# EAGLE board Qwiic EEPROM-Panel (EAGLE 9.0.1), part 1 of 2
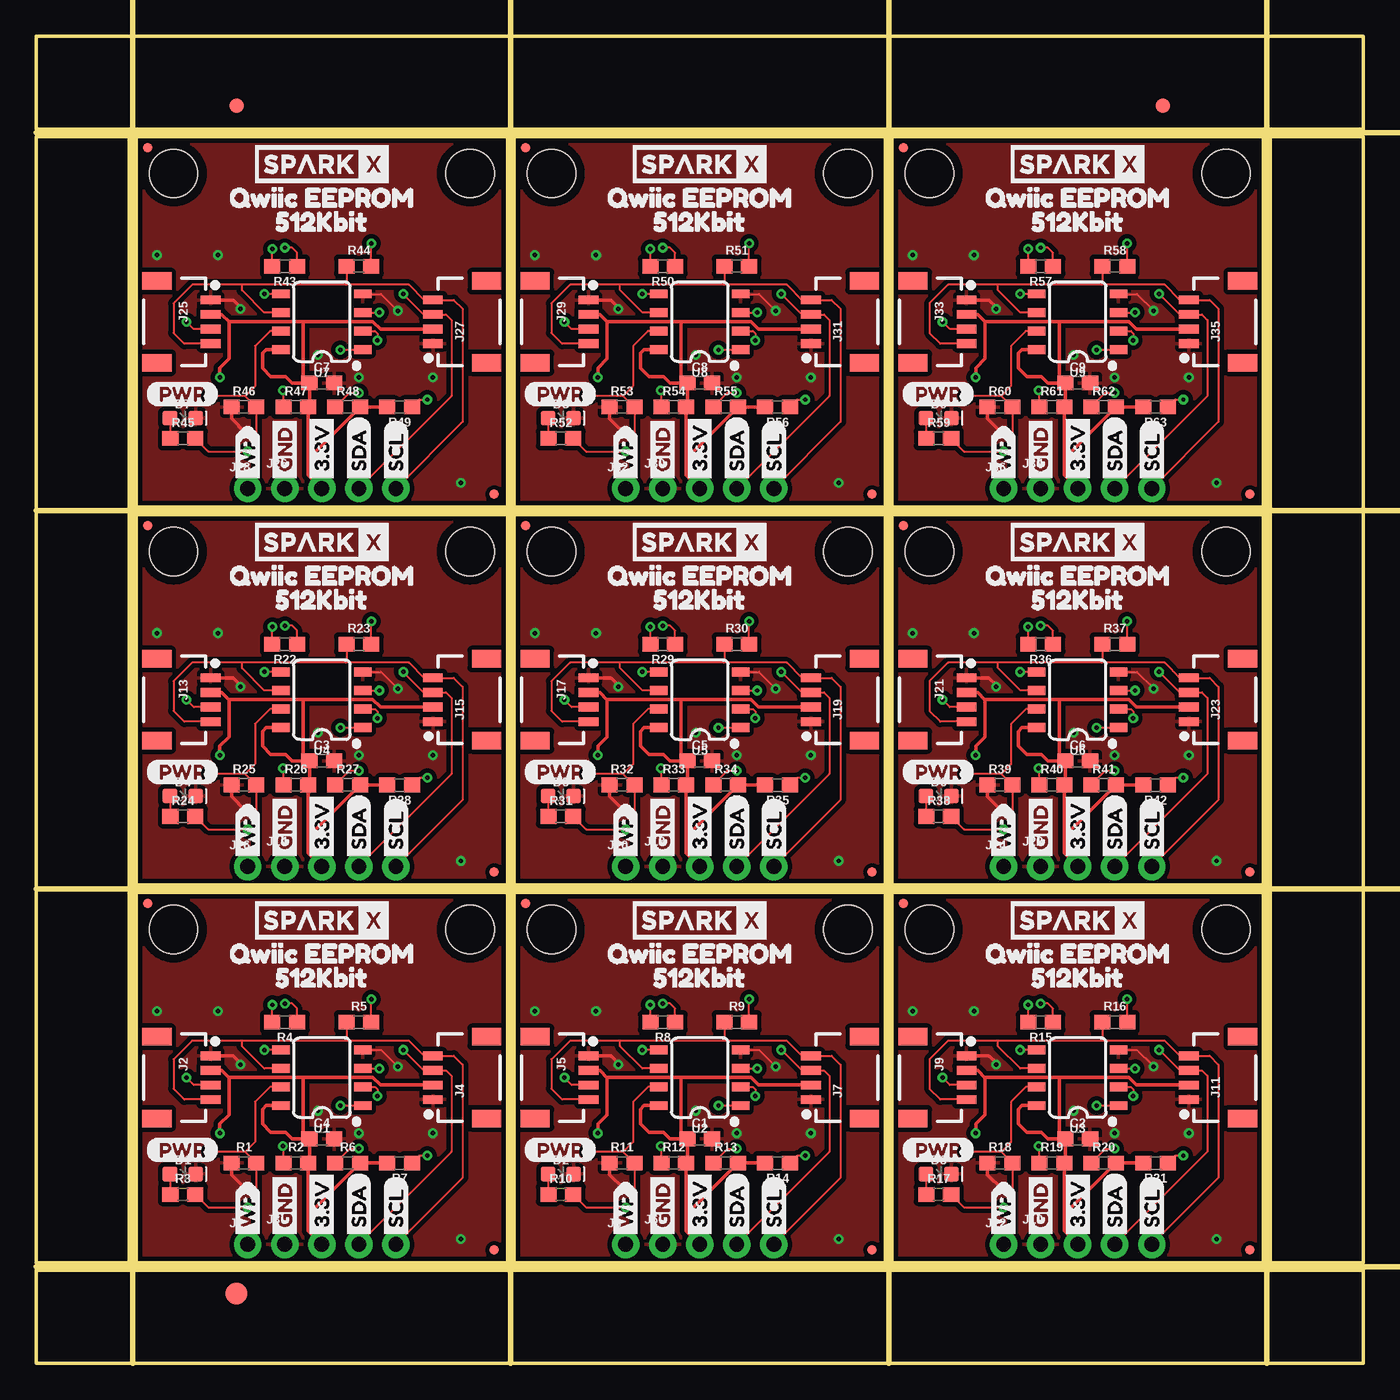
[diagram p0: board, top side]
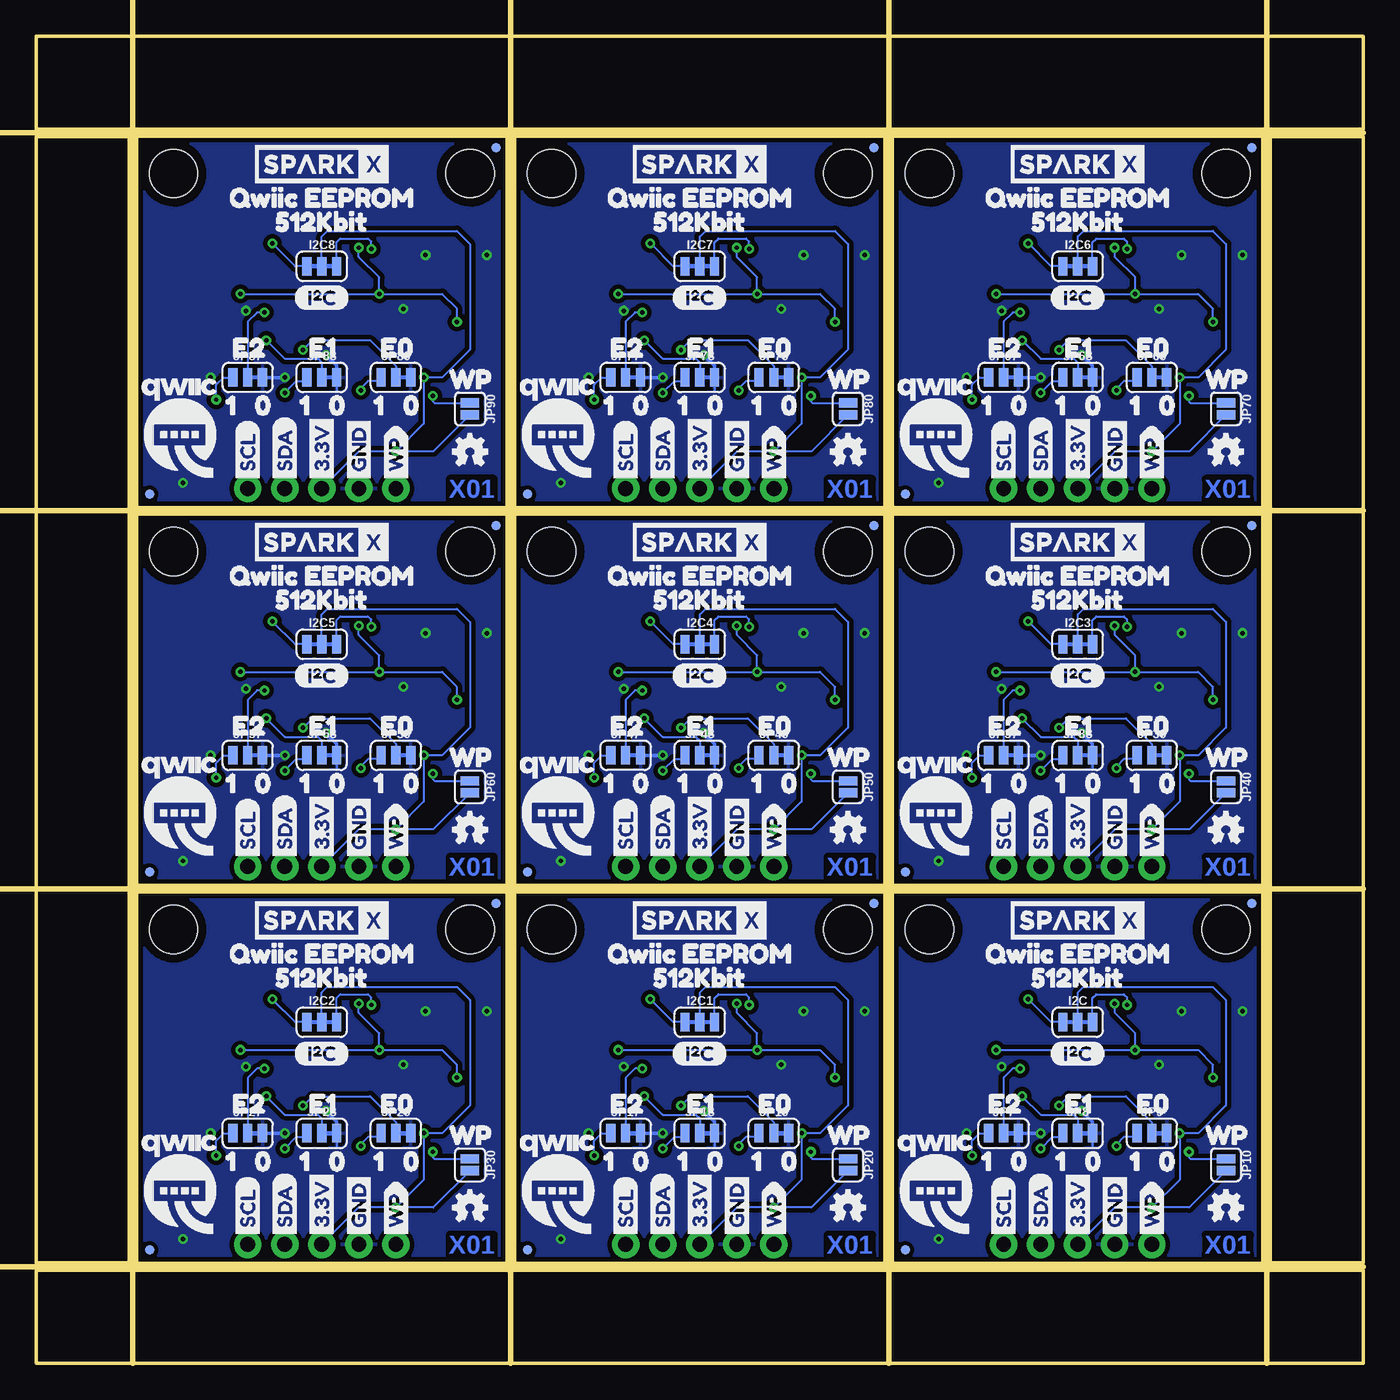
[diagram p1: board, bottom side, seen from below]

Size 90.93 x 90.93 mm. Coordinates in mm from the lower left corner, seen from the top.
Outline: 6.86,6.86 6.86,32.26 32.26,32.26 32.26,6.86 6.86,6.86
Outline: 32.77,6.86 32.77,32.26 58.17,32.26 58.17,6.86 32.77,6.86
Outline: 58.67,6.86 58.67,32.26 84.07,32.26 84.07,6.86 58.67,6.86
Outline: 6.86,32.77 6.86,58.17 32.26,58.17 32.26,32.77 6.86,32.77
Outline: 32.77,32.77 32.77,58.17 58.17,58.17 58.17,32.77 32.77,32.77
Outline: 58.67,32.77 58.67,58.17 84.07,58.17 84.07,32.77 58.67,32.77
Outline: 6.86,58.67 6.86,84.07 32.26,84.07 32.26,58.67 6.86,58.67
Outline: 32.77,58.67 32.77,84.07 58.17,84.07 58.17,58.67 32.77,58.67
Outline: 58.67,58.67 58.67,84.07 84.07,84.07 84.07,58.67 58.67,58.67
Outline: 0,6.35 90.93,6.35 90.93,0 0,0 0,6.35
Outline: 84.58,84.07 90.93,84.07 90.93,6.86 84.58,6.86 84.58,84.07
Outline: 0,90.93 90.93,90.93 90.93,84.58 0,84.58 0,90.93
Outline: 0,84.07 6.35,84.07 6.35,6.86 0,6.86 0,84.07
Copper layers (1*16): Top 0.035mm / dielectric 1.5mm / Bottom 0.035mm
Design rules "SparkFun-2-layer-PCBWay-LIMIT": minimum track width 6mil, minimum drill 0.3mm, track to track 6mil, track to pad 6mil, pad to pad 6mil, via to via 6mil, smd to smd 6mil, copper to edge 6mil, drill to drill 6mil, minimum pad ring 7mil, minimum via ring 7mil, stop-mask expansion 4mil, vias tented up to drill 25mil, thermal gap 10mil
tRestrict: area 21.2,20.8 to 21.6,21.8; area 47.1,20.8 to 47.5,21.8; area 73,20.8 to 73.4,21.8; area 21.2,46.7 to 21.6,47.8; area 47.1,46.7 to 47.5,47.8; area 73,46.7 to 73.4,47.8; area 21.2,72.6 to 21.6,73.7; area 47.1,72.6 to 47.5,73.7; area 73,72.6 to 73.4,73.7
Milling: 8 lines

## Footprints (pad centres in the part's own frame; a part is rotated, then mirrored left to right if it is on the bottom)
0603 = smd 1.1 x 1: 1 -0.85,0; 2 0.85,0
LED-0603 = smd 1 x 1: A -0.877,0; C 0.877,0
FIDUCIAL-1X2 = smd 1 x 1: 1 0,0
FIDUCIAL-1.5X3 = smd 1.5 x 1.5: 1 0,0
SMT-JUMPER_3_2-NC_TRACE_SILK = smd 0.635 x 1.27: 1 -1.016,0; 2 0,0; 3 1.016,0
1X01_NO_SILK = drill 1.016 pad 1.88: 1 0,0
1X04_1MM_RA = smd 0.6 x 1.35: 1 -1.5,0; 2 -0.5,0; 3 0.5,0; 4 1.5,0 | smd 1.2 x 2: NC1 2.8,-3.675; NC2 -2.8,-3.675
1X04_NO_SILK = drill 1.016 pad 1.88: 1 0,0; 2 2.54,0; 3 5.08,0; 4 7.62,0
MICRO-FIDUCIAL = smd 0.635 x 0.635: 1 0,0
STAND-OFF = hole 3.302: 0,0
SMT-JUMPER_3_1-NC_TRACE_SILK = smd 0.635 x 1.27: 1 -1.016,0; 2 0,0; 3 1.016,0
SMT-JUMPER_2_NO_SILK = smd 0.635 x 1.27: 1 -0.406,0; 2 0.406,0
SO08 = smd 0.6 x 1.2: 1 -1.905,-2.8; 2 -0.635,-2.8; 3 0.635,-2.8; 4 1.905,-2.8; 5 1.905,2.8; 6 0.635,2.8; 7 -0.635,2.8; 8 -1.905,2.8

## Placement (x,y rotation side)
C1  0.1uF  [0603]  45.47,15.37 0 top
C2  0.1uF  [0603]  71.37,15.37 0 top
C3  0.1uF  [0603]  19.56,41.27 0 top
C4  0.1uF  [0603]  19.56,15.37 0 top
C5  0.1uF  [0603]  45.47,41.27 0 top
C6  0.1uF  [0603]  71.37,41.27 0 top
C7  0.1uF  [0603]  19.56,67.18 0 top
C8  0.1uF  [0603]  45.47,67.18 0 top
C9  0.1uF  [0603]  71.37,67.18 0 top
D1  RED  [LED-0603]  10.03,12.95 0 top
D2  RED  [LED-0603]  35.94,12.95 0 top
D3  RED  [LED-0603]  61.85,12.95 0 top
D4  RED  [LED-0603]  10.03,38.86 0 top
D5  RED  [LED-0603]  35.94,38.86 0 top
D6  RED  [LED-0603]  61.85,38.86 0 top
D7  RED  [LED-0603]  10.03,64.77 0 top
D8  RED  [LED-0603]  35.94,64.77 0 top
D9  RED  [LED-0603]  61.85,64.77 0 top
E$1  [FIDUCIAL-1X2]  13.72,86.17 0 top
E$2  [FIDUCIAL-1X2]  77.22,86.17 0 top
E$3  [FIDUCIAL-1.5X3]  13.72,4.76 0 top
I2C  [SMT-JUMPER_3_2-NC_TRACE_SILK]  19.56,23.37 0 bottom
I2C1  [SMT-JUMPER_3_2-NC_TRACE_SILK]  45.47,23.37 0 bottom
I2C2  [SMT-JUMPER_3_2-NC_TRACE_SILK]  71.37,23.37 0 bottom
I2C3  [SMT-JUMPER_3_2-NC_TRACE_SILK]  19.56,49.28 0 bottom
I2C4  [SMT-JUMPER_3_2-NC_TRACE_SILK]  45.47,49.28 0 bottom
I2C5  [SMT-JUMPER_3_2-NC_TRACE_SILK]  71.37,49.28 0 bottom
I2C6  [SMT-JUMPER_3_2-NC_TRACE_SILK]  19.56,75.18 0 bottom
I2C7  [SMT-JUMPER_3_2-NC_TRACE_SILK]  45.47,75.18 0 bottom
I2C8  [SMT-JUMPER_3_2-NC_TRACE_SILK]  71.37,75.18 0 bottom
J1  [1X01_NO_SILK]  14.48,8.13 0 top
J2  SMD  [1X04_1MM_RA]  11.94,19.56 270 top
J3  PTH  [1X04_NO_SILK]  17.02,8.13 0 top
J4  SMD  [1X04_1MM_RA]  27.18,19.56 90 top
J5  SMD  [1X04_1MM_RA]  37.85,19.56 270 top
J6  PTH  [1X04_NO_SILK]  42.93,8.13 0 top
J7  SMD  [1X04_1MM_RA]  53.09,19.56 90 top
J8  [1X01_NO_SILK]  40.39,8.13 0 top
J9  SMD  [1X04_1MM_RA]  63.75,19.56 270 top
J10  PTH  [1X04_NO_SILK]  68.83,8.13 0 top
J11  SMD  [1X04_1MM_RA]  78.99,19.56 90 top
J12  [1X01_NO_SILK]  66.29,8.13 0 top
J13  SMD  [1X04_1MM_RA]  11.94,45.47 270 top
J14  PTH  [1X04_NO_SILK]  17.02,34.04 0 top
J15  SMD  [1X04_1MM_RA]  27.18,45.47 90 top
J16  [1X01_NO_SILK]  14.48,34.04 0 top
J17  SMD  [1X04_1MM_RA]  37.85,45.47 270 top
J18  PTH  [1X04_NO_SILK]  42.93,34.04 0 top
J19  SMD  [1X04_1MM_RA]  53.09,45.47 90 top
J20  [1X01_NO_SILK]  40.39,34.04 0 top
J21  SMD  [1X04_1MM_RA]  63.75,45.47 270 top
J22  PTH  [1X04_NO_SILK]  68.83,34.04 0 top
J23  SMD  [1X04_1MM_RA]  78.99,45.47 90 top
J24  [1X01_NO_SILK]  66.29,34.04 0 top
J25  SMD  [1X04_1MM_RA]  11.94,71.37 270 top
J26  PTH  [1X04_NO_SILK]  17.02,59.94 0 top
J27  SMD  [1X04_1MM_RA]  27.18,71.37 90 top
J28  [1X01_NO_SILK]  14.48,59.94 0 top
J29  SMD  [1X04_1MM_RA]  37.85,71.37 270 top
J30  PTH  [1X04_NO_SILK]  42.93,59.94 0 top
J31  SMD  [1X04_1MM_RA]  53.09,71.37 90 top
J32  [1X01_NO_SILK]  40.39,59.94 0 top
J33  SMD  [1X04_1MM_RA]  63.75,71.37 270 top
J34  PTH  [1X04_NO_SILK]  68.83,59.94 0 top
J35  SMD  [1X04_1MM_RA]  78.99,71.37 90 top
J36  [1X01_NO_SILK]  66.29,59.94 0 top
JP1  FIDUCIALUFIDUCIAL  [MICRO-FIDUCIAL]  7.62,31.5 0 bottom
JP2  FIDUCIALUFIDUCIAL  [MICRO-FIDUCIAL]  31.37,7.75 0 top
JP3  STAND-OFF  [STAND-OFF]  9.4,29.72 0 top
JP4  STAND-OFF  [STAND-OFF]  29.72,29.72 0 top
JP5  FIDUCIALUFIDUCIAL  [MICRO-FIDUCIAL]  31.37,7.75 0 bottom
JP6  FIDUCIALUFIDUCIAL  [MICRO-FIDUCIAL]  7.62,31.5 0 top
JP7  [SMT-JUMPER_3_1-NC_TRACE_SILK]  24.64,15.75 0 bottom
JP8  [SMT-JUMPER_3_1-NC_TRACE_SILK]  19.56,15.75 0 bottom
JP9  [SMT-JUMPER_3_1-NC_TRACE_SILK]  14.48,15.75 0 bottom
JP10  [SMT-JUMPER_2_NO_SILK]  9.4,13.59 270 bottom
JP11  STAND-OFF  [STAND-OFF]  35.31,29.72 0 top
JP12  STAND-OFF  [STAND-OFF]  55.63,29.72 0 top
JP13  FIDUCIALUFIDUCIAL  [MICRO-FIDUCIAL]  57.28,7.75 0 top
JP14  FIDUCIALUFIDUCIAL  [MICRO-FIDUCIAL]  33.53,31.5 0 top
JP15  FIDUCIALUFIDUCIAL  [MICRO-FIDUCIAL]  33.53,31.5 0 bottom
JP16  FIDUCIALUFIDUCIAL  [MICRO-FIDUCIAL]  57.28,7.75 0 bottom
JP17  [SMT-JUMPER_3_1-NC_TRACE_SILK]  50.55,15.75 0 bottom
JP18  [SMT-JUMPER_3_1-NC_TRACE_SILK]  45.47,15.75 0 bottom
JP19  [SMT-JUMPER_3_1-NC_TRACE_SILK]  40.39,15.75 0 bottom
JP20  [SMT-JUMPER_2_NO_SILK]  35.31,13.59 270 bottom
JP21  STAND-OFF  [STAND-OFF]  61.21,29.72 0 top
JP22  STAND-OFF  [STAND-OFF]  81.53,29.72 0 top
JP23  FIDUCIALUFIDUCIAL  [MICRO-FIDUCIAL]  83.19,7.75 0 top
JP24  FIDUCIALUFIDUCIAL  [MICRO-FIDUCIAL]  59.44,31.5 0 top
JP25  FIDUCIALUFIDUCIAL  [MICRO-FIDUCIAL]  59.44,31.5 0 bottom
JP26  FIDUCIALUFIDUCIAL  [MICRO-FIDUCIAL]  83.19,7.75 0 bottom
JP27  [SMT-JUMPER_3_1-NC_TRACE_SILK]  76.45,15.75 0 bottom
JP28  [SMT-JUMPER_3_1-NC_TRACE_SILK]  71.37,15.75 0 bottom
JP29  [SMT-JUMPER_3_1-NC_TRACE_SILK]  66.29,15.75 0 bottom
JP30  [SMT-JUMPER_2_NO_SILK]  61.21,13.59 270 bottom
JP31  STAND-OFF  [STAND-OFF]  9.4,55.63 0 top
JP32  STAND-OFF  [STAND-OFF]  29.72,55.63 0 top
JP33  FIDUCIALUFIDUCIAL  [MICRO-FIDUCIAL]  31.37,33.66 0 top
JP34  FIDUCIALUFIDUCIAL  [MICRO-FIDUCIAL]  7.62,57.4 0 top
JP35  FIDUCIALUFIDUCIAL  [MICRO-FIDUCIAL]  7.62,57.4 0 bottom
JP36  FIDUCIALUFIDUCIAL  [MICRO-FIDUCIAL]  31.37,33.66 0 bottom
JP37  [SMT-JUMPER_3_1-NC_TRACE_SILK]  24.64,41.66 0 bottom
JP38  [SMT-JUMPER_3_1-NC_TRACE_SILK]  19.56,41.66 0 bottom
JP39  [SMT-JUMPER_3_1-NC_TRACE_SILK]  14.48,41.66 0 bottom
JP40  [SMT-JUMPER_2_NO_SILK]  9.4,39.5 270 bottom
JP41  STAND-OFF  [STAND-OFF]  35.31,55.63 0 top
JP42  STAND-OFF  [STAND-OFF]  55.63,55.63 0 top
JP43  FIDUCIALUFIDUCIAL  [MICRO-FIDUCIAL]  57.28,33.66 0 top
JP44  FIDUCIALUFIDUCIAL  [MICRO-FIDUCIAL]  33.53,57.4 0 top
JP45  FIDUCIALUFIDUCIAL  [MICRO-FIDUCIAL]  33.53,57.4 0 bottom
JP46  FIDUCIALUFIDUCIAL  [MICRO-FIDUCIAL]  57.28,33.66 0 bottom
JP47  [SMT-JUMPER_3_1-NC_TRACE_SILK]  50.55,41.66 0 bottom
JP48  [SMT-JUMPER_3_1-NC_TRACE_SILK]  45.47,41.66 0 bottom
JP49  [SMT-JUMPER_3_1-NC_TRACE_SILK]  40.39,41.66 0 bottom
JP50  [SMT-JUMPER_2_NO_SILK]  35.31,39.5 270 bottom
JP51  STAND-OFF  [STAND-OFF]  61.21,55.63 0 top
JP52  STAND-OFF  [STAND-OFF]  81.53,55.63 0 top
JP53  FIDUCIALUFIDUCIAL  [MICRO-FIDUCIAL]  83.19,33.66 0 top
JP54  FIDUCIALUFIDUCIAL  [MICRO-FIDUCIAL]  59.44,57.4 0 top
JP55  FIDUCIALUFIDUCIAL  [MICRO-FIDUCIAL]  59.44,57.4 0 bottom
JP56  FIDUCIALUFIDUCIAL  [MICRO-FIDUCIAL]  83.19,33.66 0 bottom
JP57  [SMT-JUMPER_3_1-NC_TRACE_SILK]  76.45,41.66 0 bottom
JP58  [SMT-JUMPER_3_1-NC_TRACE_SILK]  71.37,41.66 0 bottom
JP59  [SMT-JUMPER_3_1-NC_TRACE_SILK]  66.29,41.66 0 bottom
JP60  [SMT-JUMPER_2_NO_SILK]  61.21,39.5 270 bottom
JP61  STAND-OFF  [STAND-OFF]  9.4,81.53 0 top
JP62  STAND-OFF  [STAND-OFF]  29.72,81.53 0 top
JP63  FIDUCIALUFIDUCIAL  [MICRO-FIDUCIAL]  31.37,59.56 0 top
JP64  FIDUCIALUFIDUCIAL  [MICRO-FIDUCIAL]  7.62,83.31 0 top
JP65  FIDUCIALUFIDUCIAL  [MICRO-FIDUCIAL]  7.62,83.31 0 bottom
JP66  FIDUCIALUFIDUCIAL  [MICRO-FIDUCIAL]  31.37,59.56 0 bottom
JP67  [SMT-JUMPER_3_1-NC_TRACE_SILK]  24.64,67.56 0 bottom
JP68  [SMT-JUMPER_3_1-NC_TRACE_SILK]  19.56,67.56 0 bottom
JP69  [SMT-JUMPER_3_1-NC_TRACE_SILK]  14.48,67.56 0 bottom
JP70  [SMT-JUMPER_2_NO_SILK]  9.4,65.41 270 bottom
JP71  STAND-OFF  [STAND-OFF]  35.31,81.53 0 top
JP72  STAND-OFF  [STAND-OFF]  55.63,81.53 0 top
JP73  FIDUCIALUFIDUCIAL  [MICRO-FIDUCIAL]  57.28,59.56 0 top
JP74  FIDUCIALUFIDUCIAL  [MICRO-FIDUCIAL]  33.53,83.31 0 top
JP75  FIDUCIALUFIDUCIAL  [MICRO-FIDUCIAL]  33.53,83.31 0 bottom
JP76  FIDUCIALUFIDUCIAL  [MICRO-FIDUCIAL]  57.28,59.56 0 bottom
JP77  [SMT-JUMPER_3_1-NC_TRACE_SILK]  50.55,67.56 0 bottom
JP78  [SMT-JUMPER_3_1-NC_TRACE_SILK]  45.47,67.56 0 bottom
JP79  [SMT-JUMPER_3_1-NC_TRACE_SILK]  40.39,67.56 0 bottom
JP80  [SMT-JUMPER_2_NO_SILK]  35.31,65.41 270 bottom
JP81  STAND-OFF  [STAND-OFF]  61.21,81.53 0 top
JP82  STAND-OFF  [STAND-OFF]  81.53,81.53 0 top
JP83  FIDUCIALUFIDUCIAL  [MICRO-FIDUCIAL]  83.19,59.56 0 top
JP84  FIDUCIALUFIDUCIAL  [MICRO-FIDUCIAL]  59.44,83.31 0 top
JP85  FIDUCIALUFIDUCIAL  [MICRO-FIDUCIAL]  59.44,83.31 0 bottom
JP86  FIDUCIALUFIDUCIAL  [MICRO-FIDUCIAL]  83.19,59.56 0 bottom
JP87  [SMT-JUMPER_3_1-NC_TRACE_SILK]  76.45,67.56 0 bottom
JP88  [SMT-JUMPER_3_1-NC_TRACE_SILK]  71.37,67.56 0 bottom
JP89  [SMT-JUMPER_3_1-NC_TRACE_SILK]  66.29,67.56 0 bottom
JP90  [SMT-JUMPER_2_NO_SILK]  61.21,65.41 270 bottom
LOGO1  OSHW-LOGOMINI  [OSHW-LOGO-MINI]  9.4,10.67 0 bottom
LOGO2  OSHW-LOGOMINI  [OSHW-LOGO-MINI]  35.31,10.67 0 bottom
LOGO3  OSHW-LOGOMINI  [OSHW-LOGO-MINI]  61.21,10.67 0 bottom
LOGO4  OSHW-LOGOMINI  [OSHW-LOGO-MINI]  9.4,36.58 0 bottom
LOGO5  OSHW-LOGOMINI  [OSHW-LOGO-MINI]  35.31,36.58 0 bottom
LOGO6  OSHW-LOGOMINI  [OSHW-LOGO-MINI]  61.21,36.58 0 bottom
LOGO7  OSHW-LOGOMINI  [OSHW-LOGO-MINI]  9.4,62.48 0 bottom
LOGO8  OSHW-LOGOMINI  [OSHW-LOGO-MINI]  35.31,62.48 0 bottom
LOGO9  OSHW-LOGOMINI  [OSHW-LOGO-MINI]  61.21,62.48 0 bottom
R1  10k  [0603]  14.22,13.72 0 top
R2  10k  [0603]  17.78,13.72 0 top
R3  1k  [0603]  10.03,11.56 0 top
R4  2.2k  [0603]  17.02,23.37 180 top
R5  2.2k  [0603]  22.1,23.37 0 top
R6  10k  [0603]  21.34,13.72 0 top
R7  10k  [0603]  24.89,13.72 180 top
R8  2.2k  [0603]  42.93,23.37 180 top
R9  2.2k  [0603]  48.01,23.37 0 top
R10  1k  [0603]  35.94,11.56 0 top
R11  10k  [0603]  40.13,13.72 0 top
R12  10k  [0603]  43.69,13.72 0 top
R13  10k  [0603]  47.24,13.72 0 top
R14  10k  [0603]  50.8,13.72 180 top
R15  2.2k  [0603]  68.83,23.37 180 top
R16  2.2k  [0603]  73.91,23.37 0 top
R17  1k  [0603]  61.85,11.56 0 top
R18  10k  [0603]  66.04,13.72 0 top
R19  10k  [0603]  69.6,13.72 0 top
R20  10k  [0603]  73.15,13.72 0 top
R21  10k  [0603]  76.71,13.72 180 top
R22  2.2k  [0603]  17.02,49.28 180 top
R23  2.2k  [0603]  22.1,49.28 0 top
R24  1k  [0603]  10.03,37.46 0 top
R25  10k  [0603]  14.22,39.62 0 top
R26  10k  [0603]  17.78,39.62 0 top
R27  10k  [0603]  21.34,39.62 0 top
R28  10k  [0603]  24.89,39.62 180 top
R29  2.2k  [0603]  42.93,49.28 180 top
R30  2.2k  [0603]  48.01,49.28 0 top
R31  1k  [0603]  35.94,37.46 0 top
R32  10k  [0603]  40.13,39.62 0 top
R33  10k  [0603]  43.69,39.62 0 top
R34  10k  [0603]  47.24,39.62 0 top
R35  10k  [0603]  50.8,39.62 180 top
R36  2.2k  [0603]  68.83,49.28 180 top
R37  2.2k  [0603]  73.91,49.28 0 top
R38  1k  [0603]  61.85,37.46 0 top
R39  10k  [0603]  66.04,39.62 0 top
R40  10k  [0603]  69.6,39.62 0 top
R41  10k  [0603]  73.15,39.62 0 top
R42  10k  [0603]  76.71,39.62 180 top
R43  2.2k  [0603]  17.02,75.18 180 top
R44  2.2k  [0603]  22.1,75.18 0 top
R45  1k  [0603]  10.03,63.37 0 top
R46  10k  [0603]  14.22,65.53 0 top
R47  10k  [0603]  17.78,65.53 0 top
R48  10k  [0603]  21.34,65.53 0 top
R49  10k  [0603]  24.89,65.53 180 top
R50  2.2k  [0603]  42.93,75.18 180 top
R51  2.2k  [0603]  48.01,75.18 0 top
R52  1k  [0603]  35.94,63.37 0 top
R53  10k  [0603]  40.13,65.53 0 top
R54  10k  [0603]  43.69,65.53 0 top
R55  10k  [0603]  47.24,65.53 0 top
R56  10k  [0603]  50.8,65.53 180 top
R57  2.2k  [0603]  68.83,75.18 180 top
R58  2.2k  [0603]  73.91,75.18 0 top
R59  1k  [0603]  61.85,63.37 0 top
R60  10k  [0603]  66.04,65.53 0 top
R61  10k  [0603]  69.6,65.53 0 top
R62  10k  [0603]  73.15,65.53 0 top
R63  10k  [0603]  76.71,65.53 180 top
U1  RM24C5  [SO08]  19.56,19.56 90 top
U2  RM24C5  [SO08]  45.47,19.56 90 top
U3  RM24C5  [SO08]  71.37,19.56 90 top
U4  RM24C5  [SO08]  19.56,45.47 90 top
U5  RM24C5  [SO08]  45.47,45.47 90 top
U6  RM24C5  [SO08]  71.37,45.47 90 top
U7  RM24C5  [SO08]  19.56,71.37 90 top
U8  RM24C5  [SO08]  45.47,71.37 90 top
U9  RM24C5  [SO08]  71.37,71.37 90 top
U$1  SPARKX-LOGO4  [SPARKX-MEDIUM]  19.56,30.35 0 top
U$2  SPARKX-LOGO4  [SPARKX-MEDIUM]  19.56,30.35 0 bottom
U$3  [GND1]  17.02,8.38 90 bottom
U$4  [3#3V2]  19.56,8.38 90 bottom
U$5  [SDA8]  22.1,8.38 90 bottom
U$6  [SCL9]  24.64,8.38 90 bottom
U$7  [WP6]  11.94,15.62 0 bottom
U$8  [E05]  16.64,17.78 0 bottom
U$9  [E23]  26.8,17.78 0 bottom
U$10  [(PWR)]  7.49,14.61 0 top
U$11  [(I_SUPER2_C)]  21.46,21.21 0 bottom
U$12  [00]  25.27,13.84 0 bottom
U$13  [E14]  21.59,17.78 0 bottom
U$14  [512KBIT7]  15.24,26.42 0 top
U$15  [QWIIC_EEPROM2]  12.06,28.07 0 top
U$16  [QWIIC_EEPROM2]  27.05,28.07 0 bottom
U$17  [512KBIT7]  23.88,26.42 0 bottom
U$18  [00]  20.19,13.84 0 bottom
U$19  [00]  15.11,13.84 0 bottom
U$20  [11]  27.3,13.84 0 bottom
U$21  [3#3V2]  19.56,8.38 90 top
U$22  [GND1]  17.02,8.38 90 top
U$23  [11]  22.23,13.84 0 bottom
U$24  [11]  17.14,13.84 0 bottom
U$25  [WP2]  14.48,8.38 90 bottom
U$26  [SCL9]  24.64,8.38 90 top
U$27  [SDA8]  22.1,8.38 90 top
U$28  [WP2]  14.48,8.38 90 top
U$29  [QWIIC-LOGO-MEDIUM]  29.34,12.32 0 bottom
U$30  SPARKX-LOGO4  [SPARKX-MEDIUM]  45.47,30.35 0 bottom
U$31  SPARKX-LOGO4  [SPARKX-MEDIUM]  45.47,30.35 0 top
U$32  [3#3V2]  45.47,8.38 90 top
U$33  [GND1]  42.93,8.38 90 top
U$34  [SCL9]  50.55,8.38 90 top
U$35  [SDA8]  48.01,8.38 90 top
U$36  [GND1]  42.93,8.38 90 bottom
U$37  [3#3V2]  45.47,8.38 90 bottom
U$38  [SDA8]  48.01,8.38 90 bottom
U$39  [SCL9]  50.55,8.38 90 bottom
U$40  [(PWR)]  33.4,14.61 0 top
U$41  [(I_SUPER2_C)]  47.37,21.21 0 bottom
U$42  [WP6]  37.85,15.62 0 bottom
U$43  [E05]  42.54,17.78 0 bottom
U$44  [E23]  52.7,17.78 0 bottom
U$45  [E14]  47.5,17.78 0 bottom
U$46  [512KBIT7]  41.15,26.42 0 top
U$47  [QWIIC_EEPROM2]  37.97,28.07 0 top
U$48  [QWIIC_EEPROM2]  52.96,28.07 0 bottom
U$49  [512KBIT7]  49.78,26.42 0 bottom
U$50  [00]  51.18,13.84 0 bottom
U$51  [00]  46.1,13.84 0 bottom
U$52  [00]  41.02,13.84 0 bottom
U$53  [11]  53.21,13.84 0 bottom
U$54  [11]  48.13,13.84 0 bottom
U$55  [11]  43.05,13.84 0 bottom
U$56  [WP2]  40.39,8.38 90 bottom
U$57  [WP2]  40.39,8.38 90 top
U$58  [QWIIC-LOGO-MEDIUM]  55.24,12.32 0 bottom
U$59  SPARKX-LOGO4  [SPARKX-MEDIUM]  71.37,30.35 0 bottom
U$60  SPARKX-LOGO4  [SPARKX-MEDIUM]  71.37,30.35 0 top
U$61  [3#3V2]  71.37,8.38 90 top
U$62  [GND1]  68.83,8.38 90 top
U$63  [SCL9]  76.45,8.38 90 top
U$64  [SDA8]  73.91,8.38 90 top
U$65  [GND1]  68.83,8.38 90 bottom
U$66  [3#3V2]  71.37,8.38 90 bottom
U$67  [SDA8]  73.91,8.38 90 bottom
U$68  [SCL9]  76.45,8.38 90 bottom
U$69  [(PWR)]  59.31,14.61 0 top
U$70  [(I_SUPER2_C)]  73.28,21.21 0 bottom
U$71  [WP6]  63.75,15.62 0 bottom
U$72  [E05]  68.45,17.78 0 bottom
U$73  [E23]  78.61,17.78 0 bottom
U$74  [E14]  73.41,17.78 0 bottom
U$75  [512KBIT7]  67.06,26.42 0 top
U$76  [QWIIC_EEPROM2]  63.88,28.07 0 top
U$77  [QWIIC_EEPROM2]  78.87,28.07 0 bottom
U$78  [512KBIT7]  75.69,26.42 0 bottom
U$79  [00]  77.09,13.84 0 bottom
U$80  [00]  72.01,13.84 0 bottom
U$81  [00]  66.93,13.84 0 bottom
U$82  [11]  79.12,13.84 0 bottom
U$83  [11]  74.04,13.84 0 bottom
U$84  [11]  68.96,13.84 0 bottom
U$85  [WP2]  66.29,8.38 90 bottom
U$86  [WP2]  66.29,8.38 90 top
U$87  [QWIIC-LOGO-MEDIUM]  81.15,12.32 0 bottom
U$88  SPARKX-LOGO4  [SPARKX-MEDIUM]  19.56,56.26 0 bottom
U$89  SPARKX-LOGO4  [SPARKX-MEDIUM]  19.56,56.26 0 top
U$90  [3#3V2]  19.56,34.29 90 top
U$91  [GND1]  17.02,34.29 90 top
U$92  [SCL9]  24.64,34.29 90 top
U$93  [SDA8]  22.1,34.29 90 top
U$94  [GND1]  17.02,34.29 90 bottom
U$95  [3#3V2]  19.56,34.29 90 bottom
U$96  [SDA8]  22.1,34.29 90 bottom
U$97  [SCL9]  24.64,34.29 90 bottom
U$98  [(PWR)]  7.49,40.51 0 top
U$99  [(I_SUPER2_C)]  21.46,47.12 0 bottom
U$100  [WP6]  11.94,41.53 0 bottom
U$101  [E05]  16.64,43.69 0 bottom
U$102  [E23]  26.8,43.69 0 bottom
U$103  [E14]  21.59,43.69 0 bottom
U$104  [512KBIT7]  15.24,52.32 0 top
U$105  [QWIIC_EEPROM2]  12.06,53.97 0 top
U$106  [QWIIC_EEPROM2]  27.05,53.97 0 bottom
U$107  [512KBIT7]  23.88,52.32 0 bottom
U$108  [00]  25.27,39.75 0 bottom
U$109  [00]  20.19,39.75 0 bottom
U$110  [00]  15.11,39.75 0 bottom
U$111  [11]  27.3,39.75 0 bottom
U$112  [11]  22.23,39.75 0 bottom
U$113  [11]  17.14,39.75 0 bottom
U$114  [WP2]  14.48,34.29 90 bottom
U$115  [WP2]  14.48,34.29 90 top
U$116  [QWIIC-LOGO-MEDIUM]  29.34,38.23 0 bottom
U$117  SPARKX-LOGO4  [SPARKX-MEDIUM]  45.47,56.26 0 bottom
U$118  SPARKX-LOGO4  [SPARKX-MEDIUM]  45.47,56.26 0 top
U$119  [3#3V2]  45.47,34.29 90 top
U$120  [GND1]  42.93,34.29 90 top
U$121  [SCL9]  50.55,34.29 90 top
U$122  [SDA8]  48.01,34.29 90 top
U$123  [GND1]  42.93,34.29 90 bottom
U$124  [3#3V2]  45.47,34.29 90 bottom
U$125  [SDA8]  48.01,34.29 90 bottom
U$126  [SCL9]  50.55,34.29 90 bottom
U$127  [(PWR)]  33.4,40.51 0 top
U$128  [(I_SUPER2_C)]  47.37,47.12 0 bottom
U$129  [WP6]  37.85,41.53 0 bottom
U$130  [E05]  42.54,43.69 0 bottom
U$131  [E23]  52.7,43.69 0 bottom
U$132  [E14]  47.5,43.69 0 bottom
U$133  [512KBIT7]  41.15,52.32 0 top
U$134  [QWIIC_EEPROM2]  37.97,53.97 0 top
U$135  [QWIIC_EEPROM2]  52.96,53.97 0 bottom
U$136  [512KBIT7]  49.78,52.32 0 bottom
U$137  [00]  51.18,39.75 0 bottom
U$138  [00]  46.1,39.75 0 bottom
U$139  [00]  41.02,39.75 0 bottom
U$140  [11]  53.21,39.75 0 bottom
U$141  [11]  48.13,39.75 0 bottom
U$142  [11]  43.05,39.75 0 bottom
U$143  [WP2]  40.39,34.29 90 bottom
U$144  [WP2]  40.39,34.29 90 top
U$145  [QWIIC-LOGO-MEDIUM]  55.24,38.23 0 bottom
U$146  SPARKX-LOGO4  [SPARKX-MEDIUM]  71.37,56.26 0 bottom
U$147  SPARKX-LOGO4  [SPARKX-MEDIUM]  71.37,56.26 0 top
U$148  [3#3V2]  71.37,34.29 90 top
U$149  [GND1]  68.83,34.29 90 top
U$150  [SCL9]  76.45,34.29 90 top
U$151  [SDA8]  73.91,34.29 90 top
U$152  [GND1]  68.83,34.29 90 bottom
U$153  [3#3V2]  71.37,34.29 90 bottom
U$154  [SDA8]  73.91,34.29 90 bottom
U$155  [SCL9]  76.45,34.29 90 bottom
U$156  [(PWR)]  59.31,40.51 0 top
U$157  [(I_SUPER2_C)]  73.28,47.12 0 bottom
U$158  [WP6]  63.75,41.53 0 bottom
U$159  [E05]  68.45,43.69 0 bottom
U$160  [E23]  78.61,43.69 0 bottom
U$161  [E14]  73.41,43.69 0 bottom
U$162  [512KBIT7]  67.06,52.32 0 top
U$163  [QWIIC_EEPROM2]  63.88,53.97 0 top
U$164  [QWIIC_EEPROM2]  78.87,53.97 0 bottom
U$165  [512KBIT7]  75.69,52.32 0 bottom
U$166  [00]  77.09,39.75 0 bottom
U$167  [00]  72.01,39.75 0 bottom
U$168  [00]  66.93,39.75 0 bottom
U$169  [11]  79.12,39.75 0 bottom
U$170  [11]  74.04,39.75 0 bottom
U$171  [11]  68.96,39.75 0 bottom
U$172  [WP2]  66.29,34.29 90 bottom
U$173  [WP2]  66.29,34.29 90 top
U$174  [QWIIC-LOGO-MEDIUM]  81.15,38.23 0 bottom
U$175  SPARKX-LOGO4  [SPARKX-MEDIUM]  19.56,82.17 0 bottom
U$176  SPARKX-LOGO4  [SPARKX-MEDIUM]  19.56,82.17 0 top
U$177  [3#3V2]  19.56,60.2 90 top
U$178  [GND1]  17.02,60.2 90 top
U$179  [SCL9]  24.64,60.2 90 top
U$180  [SDA8]  22.1,60.2 90 top
U$181  [GND1]  17.02,60.2 90 bottom
U$182  [3#3V2]  19.56,60.2 90 bottom
U$183  [SDA8]  22.1,60.2 90 bottom
U$184  [SCL9]  24.64,60.2 90 bottom
U$185  [(PWR)]  7.49,66.42 0 top
U$186  [(I_SUPER2_C)]  21.46,73.03 0 bottom
U$187  [WP6]  11.94,67.44 0 bottom
U$188  [E05]  16.64,69.6 0 bottom
U$189  [E23]  26.8,69.6 0 bottom
U$190  [E14]  21.59,69.6 0 bottom
U$191  [512KBIT7]  15.24,78.23 0 top
U$192  [QWIIC_EEPROM2]  12.06,79.88 0 top
U$193  [QWIIC_EEPROM2]  27.05,79.88 0 bottom
U$194  [512KBIT7]  23.88,78.23 0 bottom
U$195  [00]  25.27,65.66 0 bottom
U$196  [00]  20.19,65.66 0 bottom
U$197  [00]  15.11,65.66 0 bottom
U$198  [11]  27.3,65.66 0 bottom
U$199  [11]  22.23,65.66 0 bottom
U$200  [11]  17.14,65.66 0 bottom
U$201  [WP2]  14.48,60.2 90 bottom
U$202  [WP2]  14.48,60.2 90 top
U$203  [QWIIC-LOGO-MEDIUM]  29.34,64.14 0 bottom
U$204  SPARKX-LOGO4  [SPARKX-MEDIUM]  45.47,82.17 0 bottom
U$205  SPARKX-LOGO4  [SPARKX-MEDIUM]  45.47,82.17 0 top
U$206  [3#3V2]  45.47,60.2 90 top
U$207  [GND1]  42.93,60.2 90 top
U$208  [SCL9]  50.55,60.2 90 top
U$209  [SDA8]  48.01,60.2 90 top
U$210  [GND1]  42.93,60.2 90 bottom
U$211  [3#3V2]  45.47,60.2 90 bottom
U$212  [SDA8]  48.01,60.2 90 bottom
U$213  [SCL9]  50.55,60.2 90 bottom
U$214  [(PWR)]  33.4,66.42 0 top
U$215  [(I_SUPER2_C)]  47.37,73.03 0 bottom
U$216  [WP6]  37.85,67.44 0 bottom
U$217  [E05]  42.54,69.6 0 bottom
U$218  [E23]  52.7,69.6 0 bottom
U$219  [E14]  47.5,69.6 0 bottom
U$220  [512KBIT7]  41.15,78.23 0 top
U$221  [QWIIC_EEPROM2]  37.97,79.88 0 top
U$222  [QWIIC_EEPROM2]  52.96,79.88 0 bottom
U$223  [512KBIT7]  49.78,78.23 0 bottom
U$224  [00]  51.18,65.66 0 bottom
U$225  [00]  46.1,65.66 0 bottom
U$226  [00]  41.02,65.66 0 bottom
U$227  [11]  53.21,65.66 0 bottom
U$228  [11]  48.13,65.66 0 bottom
U$229  [11]  43.05,65.66 0 bottom
U$230  [WP2]  40.39,60.2 90 bottom
U$231  [WP2]  40.39,60.2 90 top
U$232  [QWIIC-LOGO-MEDIUM]  55.24,64.14 0 bottom
U$233  SPARKX-LOGO4  [SPARKX-MEDIUM]  71.37,82.17 0 bottom
U$234  SPARKX-LOGO4  [SPARKX-MEDIUM]  71.37,82.17 0 top
U$235  [3#3V2]  71.37,60.2 90 top
U$236  [GND1]  68.83,60.2 90 top
U$237  [SCL9]  76.45,60.2 90 top
U$238  [SDA8]  73.91,60.2 90 top
U$239  [GND1]  68.83,60.2 90 bottom
U$240  [3#3V2]  71.37,60.2 90 bottom
U$241  [SDA8]  73.91,60.2 90 bottom
U$242  [SCL9]  76.45,60.2 90 bottom
U$243  [(PWR)]  59.31,66.42 0 top
U$244  [(I_SUPER2_C)]  73.28,73.03 0 bottom
U$245  [WP6]  63.75,67.44 0 bottom
U$246  [E05]  68.45,69.6 0 bottom
U$247  [E23]  78.61,69.6 0 bottom
U$248  [E14]  73.41,69.6 0 bottom
U$249  [512KBIT7]  67.06,78.23 0 top
U$250  [QWIIC_EEPROM2]  63.88,79.88 0 top
U$251  [QWIIC_EEPROM2]  78.87,79.88 0 bottom
U$252  [512KBIT7]  75.69,78.23 0 bottom
U$253  [00]  77.09,65.66 0 bottom
U$254  [00]  72.01,65.66 0 bottom
U$255  [00]  66.93,65.66 0 bottom
U$256  [11]  79.12,65.66 0 bottom
U$257  [11]  74.04,65.66 0 bottom
U$258  [11]  68.96,65.66 0 bottom
U$259  [WP2]  66.29,60.2 90 bottom
U$260  [WP2]  66.29,60.2 90 top
U$261  [QWIIC-LOGO-MEDIUM]  81.15,64.14 0 bottom

## Library data of the parts
C1-C9 = SparkFun-Capacitors; PROD_ID: CAP-00810
D1-D9 = SparkFun-LED; PROD_ID: DIO-00819
E$1 E$2 LOGO1-LOGO9 = SparkFun-Aesthetics
E$3 = SparkFun-Retired
I2C I2C1-I2C8 JP7-JP10 JP17-JP20 JP27-JP30 JP37-JP40 JP47-JP50 JP57-JP60 JP67-JP70 JP77-JP80 JP87-JP90 = SparkFun-Jumpers
J1 J8 J12 J16 J20 J24 J28 J32 J36 = SparkFun-Connectors
J2-J7 J9-J11 J13-J15 J17-J19 J21-J23 J25-J27 J29-J31 J33-J35 U$1 U$2 U$30 U$31 U$59 U$60 U$88 U$89 U$117 U$118 U$146 U$147 U$175 U$176 U$204 U$205 U$233 U$234 = SparkX
JP1-JP6 JP11-JP16 JP21-JP26 JP31-JP36 JP41-JP46 JP51-JP56 JP61-JP66 JP71-JP76 JP81-JP86 = SparkFun
R1 R2 R6 R7 R11-R14 R18-R21 R25-R28 R32-R35 R39-R42 R46-R49 R53-R56 R60-R63 = SparkFun-Resistors; PROD_ID: RES-00824
R3 R10 R17 R24 R31 R38 R45 R52 R59 = SparkFun-Resistors; PROD_ID: RES-07856
R4 R5 R8 R9 R15 R16 R22 R23 R29 R30 R36 R37 R43 R44 R50 R51 R57 R58 = SparkFun-Resistors; PROD_ID: RES-08272
U1-U9 = SparkFun-IC-Memory
U$3-U$6 U$10 U$11 U$21 U$22 U$26 U$27 U$32-U$41 U$61-U$70 U$90-U$99 U$119-U$128 U$148-U$157 U$177-U$186 U$206-U$215 U$235-U$244 = Labels-0_04
U$7-U$9 U$13-U$17 U$42-U$49 U$71-U$78 U$100-U$107 U$129-U$136 U$158-U$165 U$187-U$194 U$216-U$223 U$245-U$252 = buzzard_labels
U$12 U$18-U$20 U$23 U$24 U$50-U$55 U$79-U$84 U$108-U$113 U$137-U$142 U$166-U$171 U$195-U$200 U$224-U$229 U$253-U$258 = buzzard_labels (1)
U$25 U$28 U$56 U$57 U$85 U$86 U$114 U$115 U$143 U$144 U$172 U$173 U$201 U$202 U$230 U$231 U$259 U$260 = buzzard_labels (2)
U$29 U$58 U$87 U$116 U$145 U$174 U$203 U$232 U$261 = Labels

## Nets
3.3V: C4.1 I2C.2 J2.2 J3.2 J4.2 JP10.2 R2.2 R3.2 R6.2 R7.2 U1.8
3.3V1: C1.1 I2C1.2 J5.2 J6.2 J7.2 JP20.2 R10.2 R12.2 R13.2 R14.2 U2.8
3.3V2: C2.1 I2C2.2 J9.2 J10.2 J11.2 JP30.2 R17.2 R19.2 R20.2 R21.2 U3.8
3.3V3: C3.1 I2C3.2 J13.2 J14.2 J15.2 JP40.2 R24.2 R26.2 R27.2 R28.2 U4.8
3.3V4: C5.1 I2C4.2 J17.2 J18.2 J19.2 JP50.2 R31.2 R33.2 R34.2 R35.2 U5.8
3.3V5: C6.1 I2C5.2 J21.2 J22.2 J23.2 JP60.2 R38.2 R40.2 R41.2 R42.2 U6.8
3.3V6: C7.1 I2C6.2 J25.2 J26.2 J27.2 JP70.2 R45.2 R47.2 R48.2 R49.2 U7.8
3.3V7: C8.1 I2C7.2 J29.2 J30.2 J31.2 JP80.2 R52.2 R54.2 R55.2 R56.2 U8.8
3.3V8: C9.1 I2C8.2 J33.2 J34.2 J35.2 JP90.2 R59.2 R61.2 R62.2 R63.2 U9.8
GND: C4.2 D1.C J2.1 J3.1 J4.1 JP7.3 JP8.3 JP9.3 R1.1 U1.4
GND1: C1.2 D2.C J5.1 J6.1 J7.1 JP17.3 JP18.3 JP19.3 R11.1 U2.4
GND2: C2.2 D3.C J9.1 J10.1 J11.1 JP27.3 JP28.3 JP29.3 R18.1 U3.4
GND3: C3.2 D4.C J13.1 J14.1 J15.1 JP37.3 JP38.3 JP39.3 R25.1 U4.4
GND4: C5.2 D5.C J17.1 J18.1 J19.1 JP47.3 JP48.3 JP49.3 R32.1 U5.4
GND5: C6.2 D6.C J21.1 J22.1 J23.1 JP57.3 JP58.3 JP59.3 R39.1 U6.4
GND6: C7.2 D7.C J25.1 J26.1 J27.1 JP67.3 JP68.3 JP69.3 R46.1 U7.4
GND7: C8.2 D8.C J29.1 J30.1 J31.1 JP77.3 JP78.3 JP79.3 R53.1 U8.4
GND8: C9.2 D9.C J33.1 J34.1 J35.1 JP87.3 JP88.3 JP89.3 R60.1 U9.4
N$1: I2C.1 R5.2
N$2: I2C.3 R4.2
N$3: D1.A R3.1
N$4: JP7.2 U1.3
N$5: JP8.2 U1.2
N$6: JP9.2 U1.1
N$7: JP9.1 R2.1
N$8: JP7.1 R7.1
N$9: JP8.1 R6.1
N$10: I2C1.1 R9.2
N$11: I2C1.3 R8.2
N$12: D2.A R10.1
N$13: JP17.2 U2.3
N$14: JP18.2 U2.2
N$15: JP19.2 U2.1
N$16: JP19.1 R12.1
N$17: JP17.1 R14.1
N$18: JP18.1 R13.1
N$19: I2C2.1 R16.2
N$20: I2C2.3 R15.2
N$21: D3.A R17.1
N$22: JP27.2 U3.3
N$23: JP28.2 U3.2
N$24: JP29.2 U3.1
N$25: JP29.1 R19.1
N$26: JP27.1 R21.1
N$27: JP28.1 R20.1
N$28: I2C3.1 R23.2
N$29: I2C3.3 R22.2
N$30: D4.A R24.1
N$31: JP37.2 U4.3
N$32: JP38.2 U4.2
N$33: JP39.2 U4.1
N$34: JP39.1 R26.1
N$35: JP37.1 R28.1
N$36: JP38.1 R27.1
N$37: I2C4.1 R30.2
N$38: I2C4.3 R29.2
N$39: D5.A R31.1
N$40: JP47.2 U5.3
N$41: JP48.2 U5.2
N$42: JP49.2 U5.1
N$43: JP49.1 R33.1
N$44: JP47.1 R35.1
N$45: JP48.1 R34.1
N$46: I2C5.1 R37.2
N$47: I2C5.3 R36.2
N$48: D6.A R38.1
N$49: JP57.2 U6.3
N$50: JP58.2 U6.2
N$51: JP59.2 U6.1
N$52: JP59.1 R40.1
N$53: JP57.1 R42.1
N$54: JP58.1 R41.1
N$55: I2C6.1 R44.2
N$56: I2C6.3 R43.2
N$57: D7.A R45.1
N$58: JP67.2 U7.3
N$59: JP68.2 U7.2
N$60: JP69.2 U7.1
N$61: JP69.1 R47.1
N$62: JP67.1 R49.1
N$63: JP68.1 R48.1
N$64: I2C7.1 R51.2
N$65: I2C7.3 R50.2
N$66: D8.A R52.1
N$67: JP77.2 U8.3
N$68: JP78.2 U8.2
N$69: JP79.2 U8.1
N$70: JP79.1 R54.1
N$71: JP77.1 R56.1
N$72: JP78.1 R55.1
N$73: I2C8.1 R58.2
N$74: I2C8.3 R57.2
N$75: D9.A R59.1
N$76: JP87.2 U9.3
N$77: JP88.2 U9.2
N$78: JP89.2 U9.1
N$79: JP89.1 R61.1
N$80: JP87.1 R63.1
N$81: JP88.1 R62.1
SCL: J2.4 J3.4 J4.4 R5.1 U1.6
SCL1: J5.4 J6.4 J7.4 R9.1 U2.6
SCL2: J9.4 J10.4 J11.4 R16.1 U3.6
SCL3: J13.4 J14.4 J15.4 R23.1 U4.6
SCL4: J17.4 J18.4 J19.4 R30.1 U5.6
SCL5: J21.4 J22.4 J23.4 R37.1 U6.6
SCL6: J25.4 J26.4 J27.4 R44.1 U7.6
SCL7: J29.4 J30.4 J31.4 R51.1 U8.6
SCL8: J33.4 J34.4 J35.4 R58.1 U9.6
SDA: J2.3 J3.3 J4.3 R4.1 U1.5
SDA1: J5.3 J6.3 J7.3 R8.1 U2.5
SDA2: J9.3 J10.3 J11.3 R15.1 U3.5
SDA3: J13.3 J14.3 J15.3 R22.1 U4.5
SDA4: J17.3 J18.3 J19.3 R29.1 U5.5
SDA5: J21.3 J22.3 J23.3 R36.1 U6.5
SDA6: J25.3 J26.3 J27.3 R43.1 U7.5
SDA7: J29.3 J30.3 J31.3 R50.1 U8.5
SDA8: J33.3 J34.3 J35.3 R57.1 U9.5
WP: J1.1 JP10.1 R1.2 U1.7
WP1: J8.1 JP20.1 R11.2 U2.7
WP2: J12.1 JP30.1 R18.2 U3.7
WP3: J16.1 JP40.1 R25.2 U4.7
WP4: J20.1 JP50.1 R32.2 U5.7
WP5: J24.1 JP60.1 R39.2 U6.7
WP6: J28.1 JP70.1 R46.2 U7.7
WP7: J32.1 JP80.1 R53.2 U8.7
WP8: J36.1 JP90.1 R60.2 U9.7